# EAGLE board D70BoxBT - V1_3 (EAGLE 9.3.0)
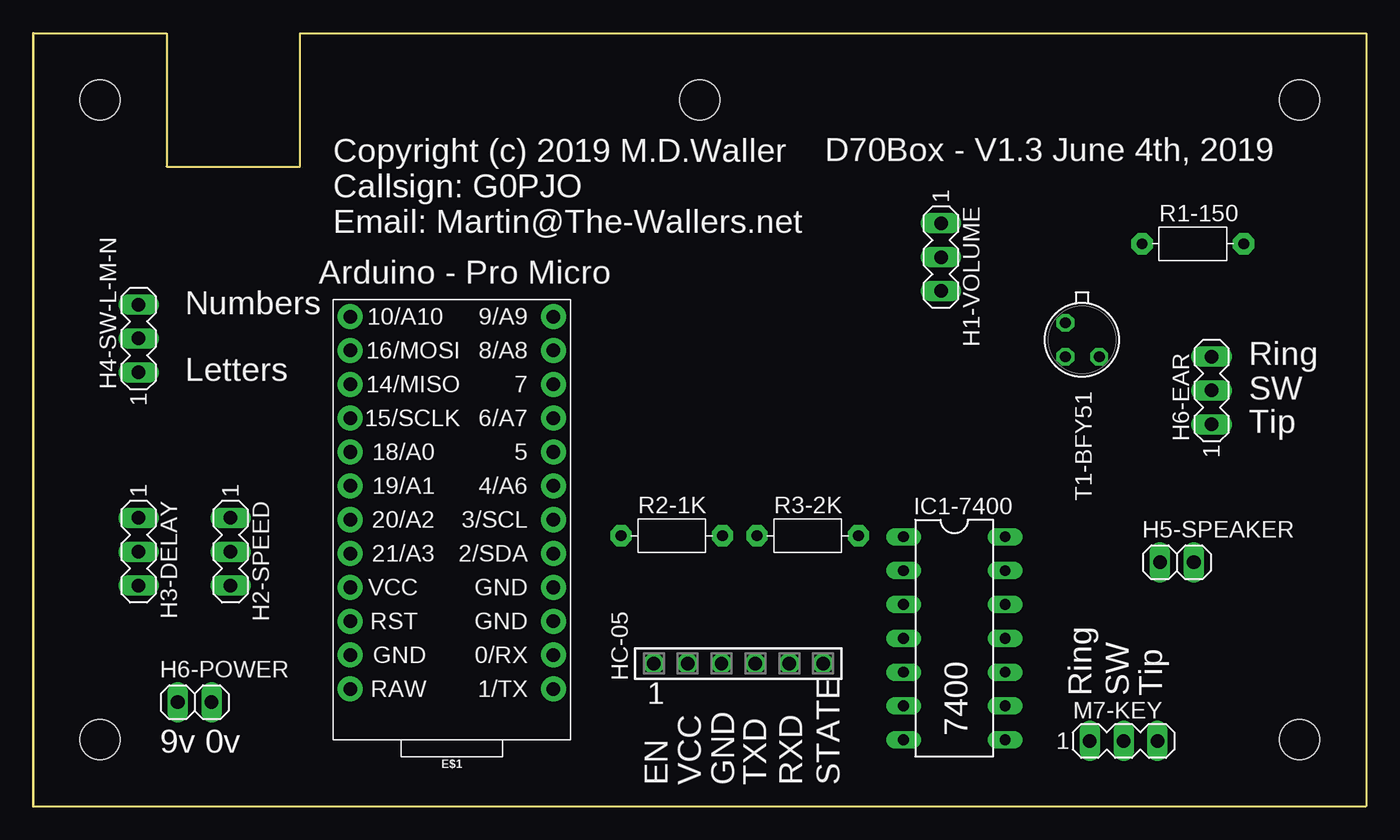
[diagram p0: board, top side]
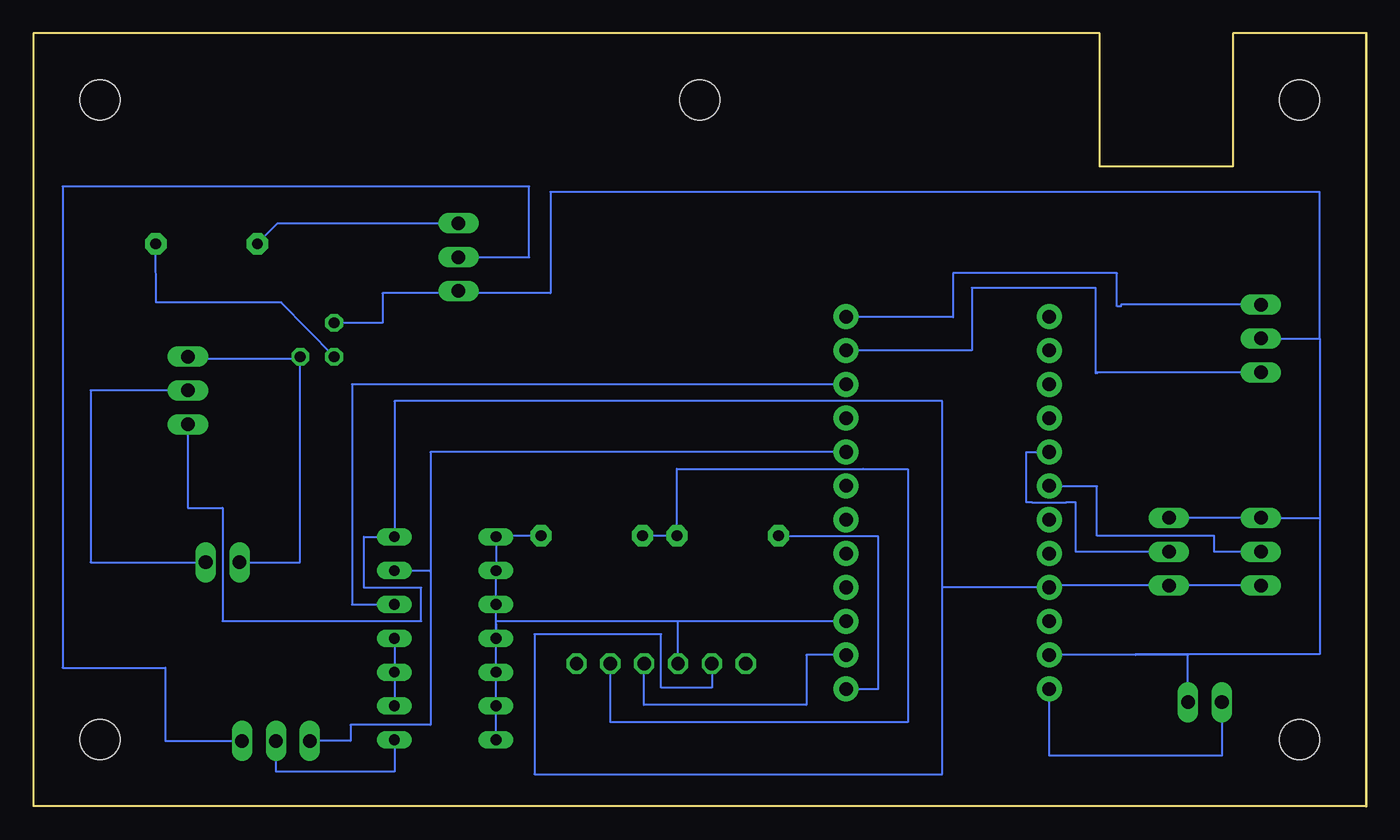
[diagram p1: board, bottom side, seen from below]

Size 100 x 58 mm. Coordinates in mm from the lower left corner, seen from the top.
Outline: 0,58 0,0 100,0 100,58 20,58 20,48 10,48 10,58 0,58
Copper layers (1*16): Top 0.035mm / dielectric 1.5mm / Bottom 0.035mm
Design rules "default": minimum track width 6mil, minimum drill 0.35mm, track to track 6mil, track to pad 6mil, pad to pad 6mil, via to via 6mil, smd to smd 6mil, copper to edge 40mil, drill to drill 6mil, minimum pad ring 10mil, minimum via ring 8mil, stop-mask expansion 4mil, vias tented up to drill 0mil, thermal gap 10mil
Holes 3 mm at 5,5 95,5 95,53 5,53 50,53

## Footprints (pad centres in the part's own frame; a part is rotated, then mirrored left to right if it is on the bottom)
SPARKFUN_PRO_MICRO = drill 1.016 pad 1.88: 1 -7.62,12.7; 2 -7.62,10.16; 3 -7.62,7.62; 4 -7.62,5.08; 5 -7.62,2.54; 6 -7.62,0; 7 -7.62,-2.54; 8 -7.62,-5.08; 9 -7.62,-7.62; 10 -7.62,-10.16; 11 -7.62,-12.7; 12 -7.62,-15.24; 13 7.62,-15.24; 14 7.62,-12.7; 15 7.62,-10.16; 16 7.62,-7.62; 17 7.62,-5.08; 18 7.62,-2.54; 19 7.62,0; 20 7.62,2.54; 21 7.62,5.08; 22 7.62,7.62; 23 7.62,10.16; VCC 7.62,12.7
MA03-1 = drill 1.016 long: 1 -2.54,0; 2 0,0; 3 2.54,0
1X02 = drill 1.016 long: 1 -1.27,0; 2 1.27,0
SSW-106-02-G-S = drill 1 pad 1.5 octagon: 1 -6.35,0; 2 -3.81,0; 3 -1.27,0; 4 1.27,0; 5 3.81,0; 6 6.35,0
DIL14 = drill 0.813 long: 1 -7.62,-3.81; 2 -5.08,-3.81; 3 -2.54,-3.81; 4 0,-3.81; 5 2.54,-3.81; 6 5.08,-3.81; 7 7.62,-3.81; 8 7.62,3.81; 9 5.08,3.81; 10 2.54,3.81; 11 0,3.81; 12 -2.54,3.81; 13 -5.08,3.81; 14 -7.62,3.81
R-7,5 = drill 0.813 pad 1.6 octagon: 1 -3.81,0; 2 3.81,0
TO18 = drill 0.813 octagon: 1 -1.27,-1.27; 2 1.27,-1.27; 3 1.27,1.27

## Placement (x,y rotation side)
E$1  [SPARKFUN_PRO_MICRO]  31.4,21.5 180 top
H1-VOLUME  22K - Lin  [MA03-1]  68.1,41.2 270 top
H2-SPEED  10K - Lin  [MA03-1]  14.8,19.1 270 top
H3-DELAY  10K - Lin  [MA03-1]  7.9,19.1 270 top
H4-SW-L-M-N  SPDT - Centre off  [MA03-1]  7.9,35.1 90 top
H5-SPEAKER  8 - Speaker  [1X02]  85.8,18.3 0 top
H6-EAR  [MA03-1]  88.4,31.2 90 top
H6-POWER  9v 0v  [1X02]  12.1,7.8 0 top
HC-05  [SSW-106-02-G-S]  52.9,10.7 0 top
IC1-7400  7400  [DIL14]  69.1,12.6 270 top
M7-KEY  [MA03-1]  81.8,4.9 0 top
R1-150  150  [R-7,5]  87,42.2 0 top
R2-1K  1K  [R-7,5]  47.9,20.3 0 top
R3-2K  2K  [R-7,5]  58.1,20.3 0 top
T1-BFY51  BFY51  [TO18]  78.7,35 270 top

## Library data of the parts
E$1 = ArduinoLibrary
H1-VOLUME H2-SPEED H3-DELAY H4-SW-L-M-N H6-EAR M7-KEY = con-lstb
H5-SPEAKER H6-POWER = pinhead
HC-05 = con-samtec
IC1-7400 = 74xx-eu
R1-150 R2-1K R3-2K = discrete
T1-BFY51 = linear

## Nets
S$1: IC1-7400.8 M7-KEY.2
S$3: H1-VOLUME.1 R1-150.1
S$5: H5-SPEAKER.1 H6-EAR.3 T1-BFY51.3
S$6: E$1.VCC H6-POWER.1
S$7: IC1-7400.9 IC1-7400.10 IC1-7400.11
S$9: E$1.11 H4-SW-L-M-N.1
S$10: E$1.18 H3-DELAY.2
S$12: E$1.12 H4-SW-L-M-N.3
S$14: E$1.8 IC1-7400.13 M7-KEY.1
S$15: E$1.3 HC-05.3 IC1-7400.1 IC1-7400.2 IC1-7400.3 IC1-7400.4 IC1-7400.5 IC1-7400.6 IC1-7400.7 R3-2K.2
S$16: E$1.21 H2-SPEED.3 H3-DELAY.3 H6-EAR.1 HC-05.2 IC1-7400.14
S$17: E$1.10 IC1-7400.12
S$18: E$1.17 H2-SPEED.2
S$19: R1-150.2 T1-BFY51.2
S$20: H1-VOLUME.2 M7-KEY.3
S$21: E$1.2 HC-05.4
S$23: H5-SPEAKER.2 H6-EAR.2
S$24: E$1.23 H1-VOLUME.3 H2-SPEED.1 H3-DELAY.1 H4-SW-L-M-N.2 H6-POWER.2 T1-BFY51.1
S$25: E$1.1 R2-1K.1
S$27: HC-05.5 R2-1K.2 R3-2K.1
S$28: HC-05.6

## Tracks (layer width: path | path; a pad name or v marks a point on that pad's centre or on a via)
S$1
  Top 0.152: IC1-7400.8
  Bottom 0.152: IC1-7400.8 72.91,2.6 81.8,2.6 M7-KEY.2
S$3
  Bottom 0.152: R1-150.1 81.65,43.74 H1-VOLUME.1
S$5
  Bottom 0.152: H6-EAR.3 88.4,33.6 80.1,33.6 T1-BFY51.3 80,33.73 80,18.3 H5-SPEAKER.1
S$6
  Bottom 0.152: H6-POWER.1 10.83,3.8 23.78,3.8 E$1.VCC
S$7
  Bottom 0.152: IC1-7400.11 IC1-7400.10 IC1-7400.9
S$9
  Top 0.152: 39.02,34.1 E$1.11
  Bottom 0.152: H4-SW-L-M-N.1 20.2,32.56 20.2,32.5 20.3,32.5 20.3,38.9 29.6,38.9 29.6,34.2 E$1.11 39.02,34.1
S$10
  Bottom 0.152: H3-DELAY.2 11.4,19.1 11.4,20.3 20.2,20.3 20.2,24 23.78,24 E$1.18
S$12
  Top 0.152: 39,36.74 E$1.12
  Bottom 0.152: H4-SW-L-M-N.3 18.4,37.64 18.4,37.5 18.7,37.5 18.7,40 31,40 31,36.7 39.02,36.7 E$1.12
S$14
  Bottom 0.152: E$1.8 70.2,26.58 70.2,17.68 | M7-KEY.1 76.2,4.9 76.2,6.1 70.2,6.1 70.2,17.6 70.2,17.68 | IC1-7400.13 70.2,17.68
S$15
  Bottom 0.152: IC1-7400.1 65.29,20.2 | 65.29,20.2 IC1-7400.2 IC1-7400.3 65.29,13.88 | IC1-7400.7 IC1-7400.6 IC1-7400.5 IC1-7400.4 | 65.29,13.7 IC1-7400.4 | IC1-7400.4 65.29,13.88 | E$1.3 51.63,13.88 | 51.63,13.88 65.29,13.88 | HC-05.3 51.63,13.88 | R3-2K.2 65.19,20.3 65.29,20.2
S$16
  Top 0.152: 23.78,16.5 E$1.21
  Bottom 0.152: 23.78,16.4 E$1.21 | E$1.21 23.78,16.56 H2-SPEED.3 H3-DELAY.3 | H6-EAR.1 88.4,22.4 85.8,22.4 85.8,13.9 70.9,13.9 70.9,16.4 75.2,16.4 75.2,20.22 IC1-7400.14 72.91,30.39 31.8,30.39 31.8,16.42 | E$1.21 31.8,16.42 | HC-05.2 49.09,8.9 52.9,8.9 52.9,12.9 62.4,12.9 62.4,2.4 31.8,2.4 31.8,16.42
S$17
  Bottom 0.152: E$1.10 76.1,31.66 76.1,15.14 IC1-7400.12
S$18
  Bottom 0.152: H2-SPEED.2 21.8,19.1 21.8,22.8 22.51,22.8 22.51,22.77 25.05,22.77 25.05,22.8 25.5,22.8 25.5,26.58 E$1.17
S$19
  Bottom 0.152: T1-BFY51.2 81.4,37.8 90.8,37.8 R1-150.2
S$20
  Bottom 0.152: H1-VOLUME.2 62.8,41.2 62.8,46.5 97.8,46.5 97.8,10.4 90.1,10.4 90.1,4.9 M7-KEY.3
S$21
  Bottom 0.152: E$1.2 42,11.34 42,7.6 54.2,7.6 54.2,10.7 HC-05.4
S$23
  Bottom 0.152: H6-EAR.2 95.7,31.2 95.7,18.3 H5-SPEAKER.2
S$24
  Top 0.152: 8,35.1 H4-SW-L-M-N.2
  Bottom 0.152: T1-BFY51.1 73.8,36.27 73.8,38.5 61.2,38.5 61.2,46.1 3.5,46.1 3.5,35.1 | H1-VOLUME.3 68.1,38.5 66.9,38.5 | 17.3,11.34 13.37,11.34 H6-POWER.2 | 17.3,11.34 E$1.23 | H2-SPEED.1 H3-DELAY.1 3.5,21.64 | 3.5,21.64 3.5,11.4 17.3,11.4 17.3,11.34 | H4-SW-L-M-N.2 3.5,35.1 | 3.5,35.1 3.5,21.64
S$25
  Bottom 0.152: E$1.1 36.6,8.8 36.6,20.23 44.09,20.23 R2-1K.1
S$27
  Bottom 0.152: HC-05.5 56.7,6.3 34.4,6.3 34.4,25.3 37.75,25.3 37.75,25.31 51.71,25.31 R2-1K.2 R3-2K.1
S$28
  Bottom 0.152: 59.3,10.7 HC-05.6

## Text on the board
tPlace: Copyright (c) 2019 M.D.Waller / Callsign: G0PJO / Email: Martin@The-Wallers.net
tNames: D70Box - V1.3 June 4th, 2019 | Arduino - Pro Micro | Numbers | Ring | Letters | SW | Tip | Ring | SW | Tip | 7400 | 9v 0v | EN | VCC | GND | TXD | RXD | STATE